# Altium PCB PCB_Constant-Voltage_2022-05-03.pcbdoc
Units mm, origin at the board's own origin, x right, y up, seen from the top; angles counter-clockwise.
Board outline 142.11 x 83.95 mm, 2 copper layers (Top Layer, Bottom Layer); 18 components, 17 nets, 79 pads, 2 vias.
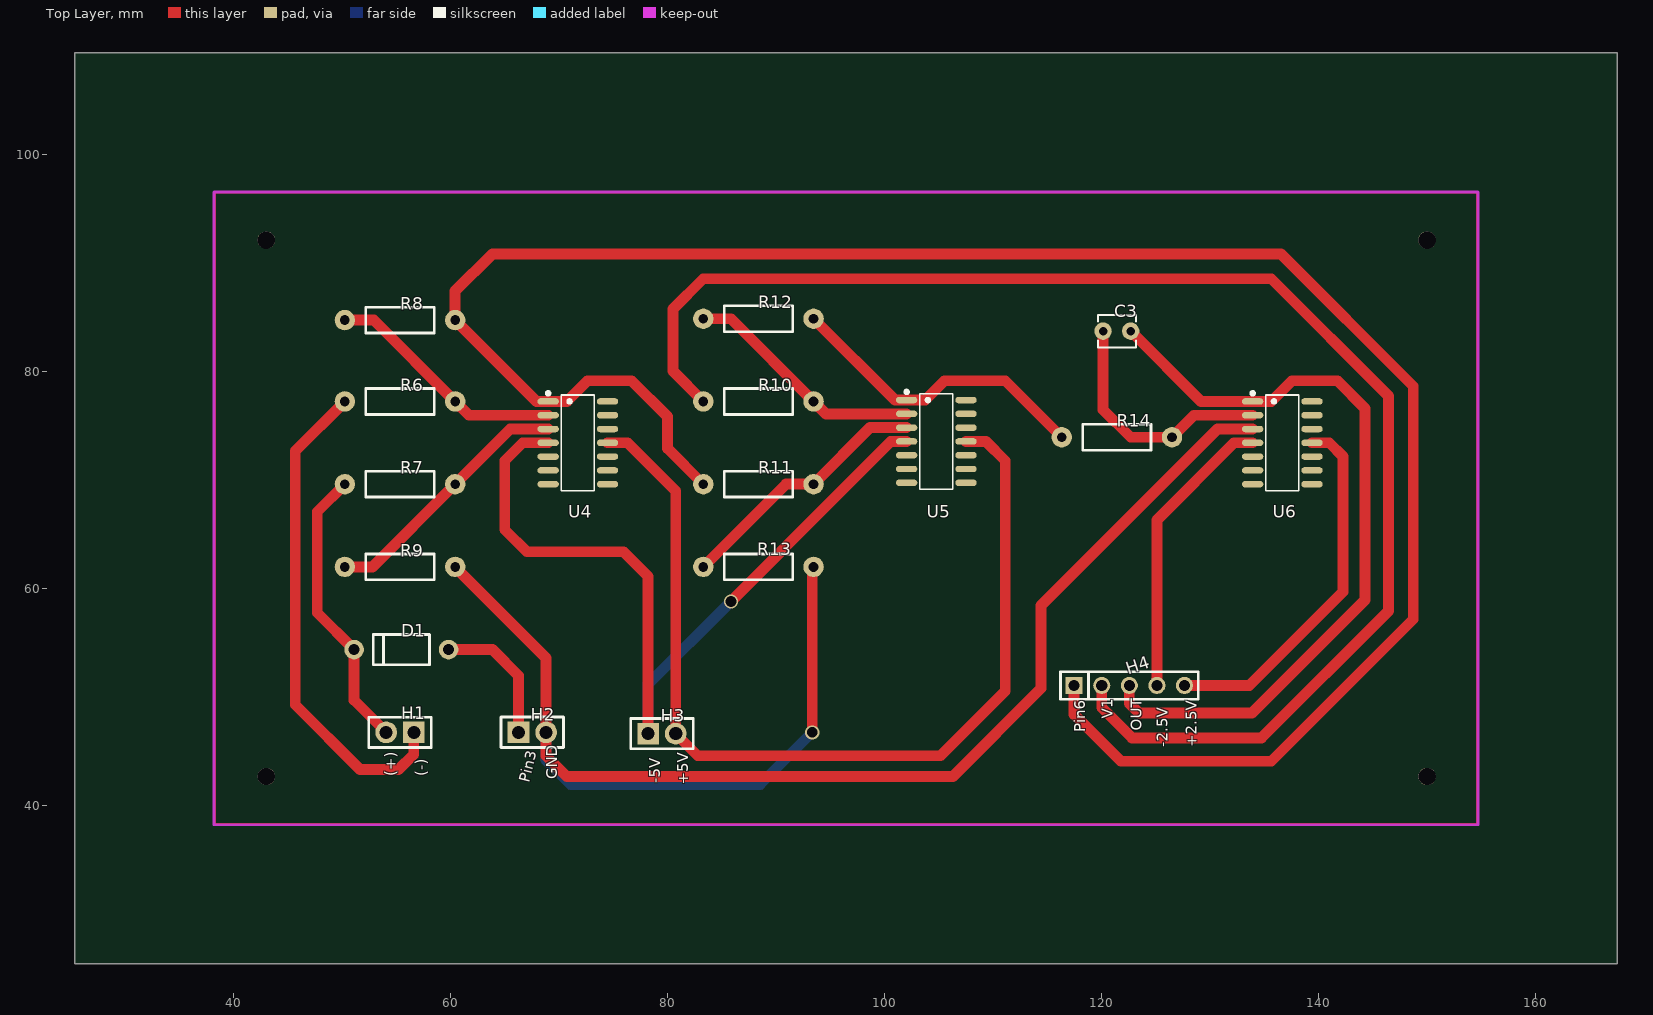
[diagram p0: Top Layer view]
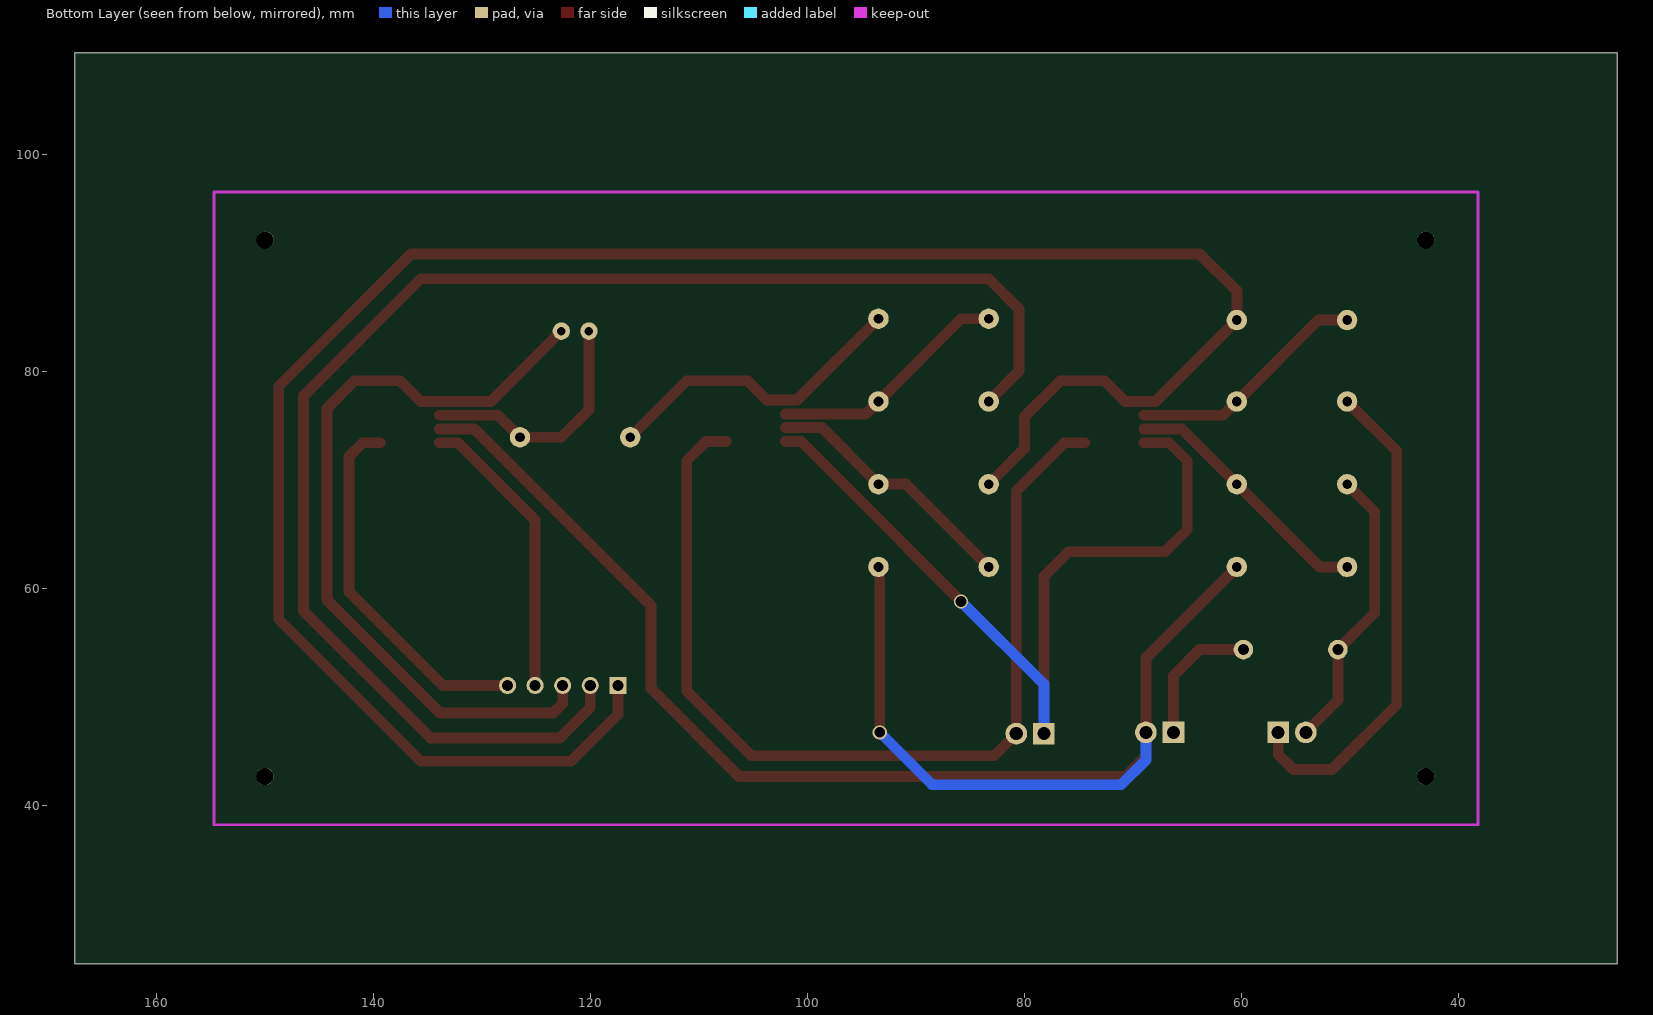
[diagram p1: Bottom Layer view, seen from below]

## Layer stack, top to bottom
Top Layer: signal copper (thickness not stored)
Dielectric: dielectric 0.32, FR-4, Dk 4.8
Bottom Layer: signal copper (thickness not stored)

## Board outline
167.513,25.4 25.4,25.4 25.4,109.347 167.513,109.347

## Components (designator, comment, footprint, x,y, rotation, side; value= is the part's Value field where it differs from the comment)
C3 "1uF" CAP-TH_L3.5-W3.0-P2.54-D0.8 121.412,83.693 r0 top
D1 "1N5819" DO-41_BD2.4-L4.7-P8.70-D0.9-RD 55.499,54.356 r0 top
H1 "Header-Female-2.54_1x2" HDR-TH_2P-P2.54-V-F 55.372,46.736 r180 top
H2 "Header-Female-2.54_1x2" HDR-TH_2P-P2.54-V-F 67.564,46.736 r0 top
H3 "Header-Female-2.54_1x2" HDR-TH_2P-P2.54-V-F 79.502,46.609 r0 top
H4 "Header-Female-2.54_1x5" HDR-TH_5P-P2.54-V-F 122.555,51.054 r0 top
R6 "100k" AXIAL-0.4 55.372,77.216 r0 top
R7 "100k" AXIAL-0.4 55.372,69.596 r0 top
R8 "10k" AXIAL-0.4 55.372,84.709 r0 top
R9 "10k" AXIAL-0.4 55.372,61.976 r180 top
R10 "10k" AXIAL-0.4 88.392,77.216 r0 top
R11 "10k" AXIAL-0.4 88.392,69.596 r0 top
R12 "10k" AXIAL-0.4 88.392,84.836 r0 top
R13 "10k" AXIAL-0.4 88.392,61.976 r180 top
R14 "7.5k" AXIAL-0.4 121.412,73.914 r0 top
U4 "LM324D" SO-14_L8.9-W3.9-P1.27-LS6.0-BL 71.755,73.406 r270 top
U5 "LM324D" SO-14_L8.9-W3.9-P1.27-LS6.0-BL 104.775,73.533 r270 top
U6 "LM324D" SO-14_L8.9-W3.9-P1.27-LS6.0-BL 136.652,73.406 r270 top

## Footprints (in the part's own frame and the unit in brackets; to place one, negate y for a bottom-side part, rotate by r counter-clockwise, add the part's x,y. Pads: shape width x height; smd on the part's side, far side on the other; paste and mask are expansions set on the pad)
AXIAL-0.4 [mil]
  round 74 hole 35.4: 1(-200,0) 2(200,0)
  silkscreen extent -124,-47 124,47
CAP-TH_L3.5-W3.0-P2.54-D0.8 [mm]
  round 1.6 hole 0.8: 1(-1.27,0) 2(1.27,0)
  silkscreen extent -1.75,-1.5 1.75,1.5
DO-41_BD2.4-L4.7-P8.70-D0.9-RD [mm]
  round 1.8 hole 1: 1(-4.35,0) 2(4.35,0)
  silkscreen extent -2.6,-1.4 2.6,1.4
HDR-TH_2P-P2.54-V-F [mm]
  rect 2x2 hole 1.2: 1(-1.27,0)
  round 2 hole 1.2: 2(1.27,0)
  silkscreen extent -2.88,-1.39 2.88,1.4
HDR-TH_5P-P2.54-V-F [mil]
  rect 62x62 hole 40.16: 1(-200,0)
  round 62 hole 40.16: 2(-100,0) 3(0,0) 4(100,0) 5(200,0)
  silkscreen extent -250,-50 250,50
SO-14_L8.9-W3.9-P1.27-LS6.0-BL [mm]
  oval 0.595x1.968 smd: 1(-3.81,-2.734) 2(-2.54,-2.734) 3(-1.27,-2.734) 4(0,-2.734) 5(1.27,-2.734) 6(2.54,-2.734) 7(3.81,-2.734) 8(3.81,2.734) 9(2.54,2.734) 10(1.27,2.734) 11(0,2.734) 12(-1.27,2.734) 13(-2.54,2.734) 14(-3.81,2.734)
  silkscreen extent -4.71,-2.88 4.4,1.52

## Free pads (board coordinates)
  round 1.6 hole 1.6: 2(43.053,42.672) 2(43.053,92.075) 2(149.987,42.672) 2(149.987,92.075)

## Via types
v1: diameter 1.3, hole 1, Top Layer to Bottom Layer, tented both sides, 2 vias

## Nets (pads, with @x,y where several pads share a name; then routed paths per layer and width w, separated by ;. In a path a pad name is that pad's centre, name@x,y a point inside that pad or via, vN(x,y) a via of type N, cw(c..) or ccw(c..) an arc to the next point about the centre after c; other vN are vias at no path point)
+2.5V: H4.5 U6.11 | length 34
  Top Layer w1: H4.5 133.604,51.054 142.24,59.69 142.24,72.136 140.97,73.406 U6.11
+5V: H3.2 U4.11 U5.11 | length 89.7
  Top Layer w1: U4.11 76.327,73.406 80.772,68.961 H3.2 82.804,44.577 105.156,44.577 111.125,50.546 111.125,71.755 109.347,73.533 U5.11
-2.5V: H4.4 U6.4 | length 27
  Top Layer w1: H4.4 125.095,66.294 132.207,73.406 U6.4
-5V: H3.1 U4.4 U5.4 | length 78.1
  Top Layer w1: U4.4 66.675,73.406 65.024,71.755 65.024,65.405 67.056,63.373 75.946,63.373 78.232,61.087 H3.1 ; v1(85.852,58.801) 95.758,68.707 100.584,73.533 U5.4
  Bottom Layer w1: H3.1 78.232,51.181 v1(85.852,58.801)
BATTERY(+): D1.1 H1.2 R7.1 | length 26.5
  Top Layer w1: R7.1 47.752,67.056 47.752,57.752 D1.1 ; D1.1 51.149,49.689 H1.2
BATTERY(-): H1.1 R6.1 | length 45.8
  Top Layer w1: R6.1 45.72,72.644 45.72,49.276 51.689,43.307 55.245,43.307 56.642,44.704 H1.1
C3_1: C3.1 R14.2 U6.2 | length 22.9
  Top Layer w1: C3.1 120.142,76.454 122.682,73.914 R14.2 128.524,75.946 U6.2
GND: H2.2 R9.1 R13.1 U6.3 | length 149.8
  Top Layer w1: R9.1 68.834,53.594 H2.2 68.834,44.577 70.739,42.672 106.299,42.672 114.427,50.8 114.427,58.42 130.683,74.676 U6.3 ; v1(93.345,46.736) 93.345,61.849 R13.1
  Bottom Layer w1: H2.2 68.834,44.196 71.12,41.91 88.519,41.91 v1(93.345,46.736)
OUTPUT: C3.2 H4.3 U6.1 | length 71.8
  Top Layer w1: H4.3 122.555,49.403 123.444,48.514 133.858,48.514 144.272,58.928 144.272,76.581 141.732,79.121 137.541,79.121 135.636,77.216 U6.1 ; C3.2 129.159,77.216 U6.1
PIN3: D1.2 H2.1 | length 12.7
  Top Layer w1: D1.2 63.881,54.356 66.294,51.943 H2.1
POWER(1): H4.2 R10.1 | length 135.5
  Top Layer w1: R10.1 80.518,80.01 80.518,85.725 83.312,88.519 135.636,88.519 146.431,77.724 146.431,57.912 134.747,46.228 122.809,46.228 120.015,49.022 H4.2
R8_1: R6.2 R8.1 U4.2 | length 22.4
  Top Layer w1: R8.1 52.959,84.709 R6.2 61.722,75.946 U4.2
R9_2: R7.2 R9.2 U4.3 | length 24
  Top Layer w1: R9.2 52.832,61.976 R7.2 65.532,74.676 U4.3
R12_1: R10.2 R12.1 U5.2 | length 22.4
  Top Layer w1: R12.1 85.852,84.836 R10.2 94.615,76.073 U5.2
R13_2: R11.2 R13.2 U5.3 | length 24
  Top Layer w1: R13.2 90.932,69.596 R11.2 98.679,74.803 U5.3
U2.1-U2.2: H4.1 R8.2 R11.1 U4.1 | length 192.4
  Top Layer w1: U4.1 67.945,77.216 R8.2 60.452,87.376 63.881,90.805 136.525,90.805 148.717,78.613 148.717,57.15 135.636,44.069 121.793,44.069 117.475,48.387 H4.1 ; U4.1 70.739,77.216 72.644,79.121 76.708,79.121 80.01,75.819 80.01,72.898 R11.1
U2.2-U2.3: R12.2 R14.1 U5.1 | length 28.9
  Top Layer w1: R12.2 100.965,77.343 U5.1 ; U5.1 103.759,77.343 105.537,79.121 111.125,79.121 R14.1
pads on no net: U4.5 U4.6 U4.7 U4.8 U4.9 U4.10 U4.12 U4.13 U4.14 U5.5 U5.6 U5.7 U5.8 U5.9 U5.10 U5.12 U5.13 U5.14 U6.5 U6.6 U6.7 U6.8 U6.9 U6.10 U6.12 U6.13 U6.14

## Polygon pours and split planes (outlines as drawn)
GND on Top Layer (solid): 38.354,96.393 38.354,38.354 154.559,38.354 154.559,96.393 154.432,96.393

## Silkscreen, mask and mechanical layers (free items; w line width, h text height)
Top Overlay:
  text "V1" at 121.023,48.006 h1 r90
  text "OUT" at 123.69,46.863 h1 r90
  text "Pin6" at 118.483,46.736 h1 r90
  text "-2.5V" at 126.103,45.339 h1 r90
  text "+2.5V" at 128.77,45.339 h1 r90
  text "(+)" at 54.983,42.672 h1 r90
  text "(-)" at 57.777,42.672 h1 r90
  text "GND" at 69.842,42.418 h1 r90
  text "Pin3" at 67.287,42.043 h1 r76
  text "-5V" at 79.367,42.037 h1 r90
  text "+5V" at 81.907,41.91 h1 r90